# Altium PCB 多种信号发生器.pcbdoc
Units mil, origin at the board's own origin, x right, y up, seen from the top; angles counter-clockwise.
Board outline 4410 x 4980 mil, 2 copper layers (Top Layer, Bottom Layer); 78 components, 38 nets, 214 pads, 272 vias.
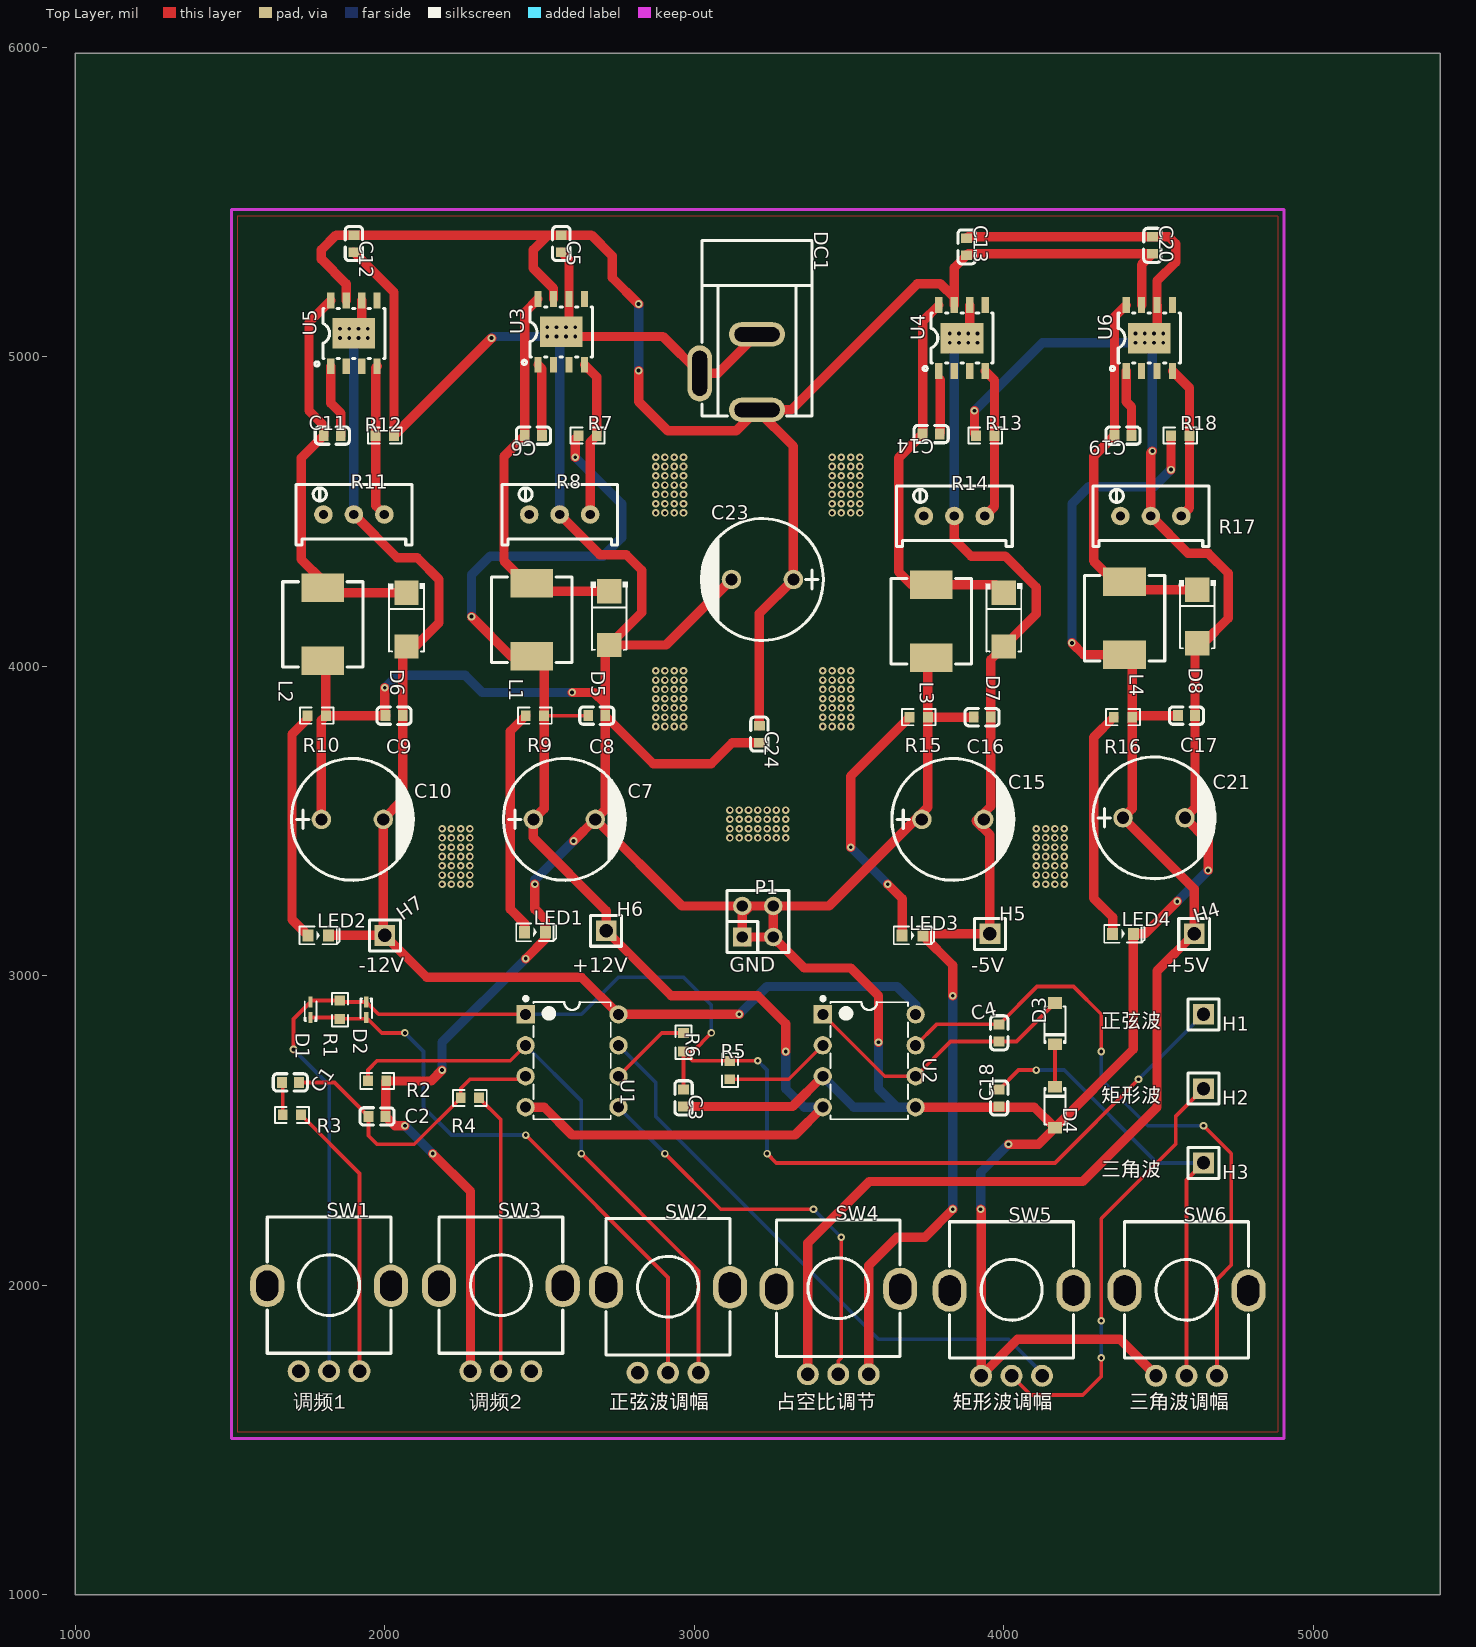
[diagram p0: Top Layer view]
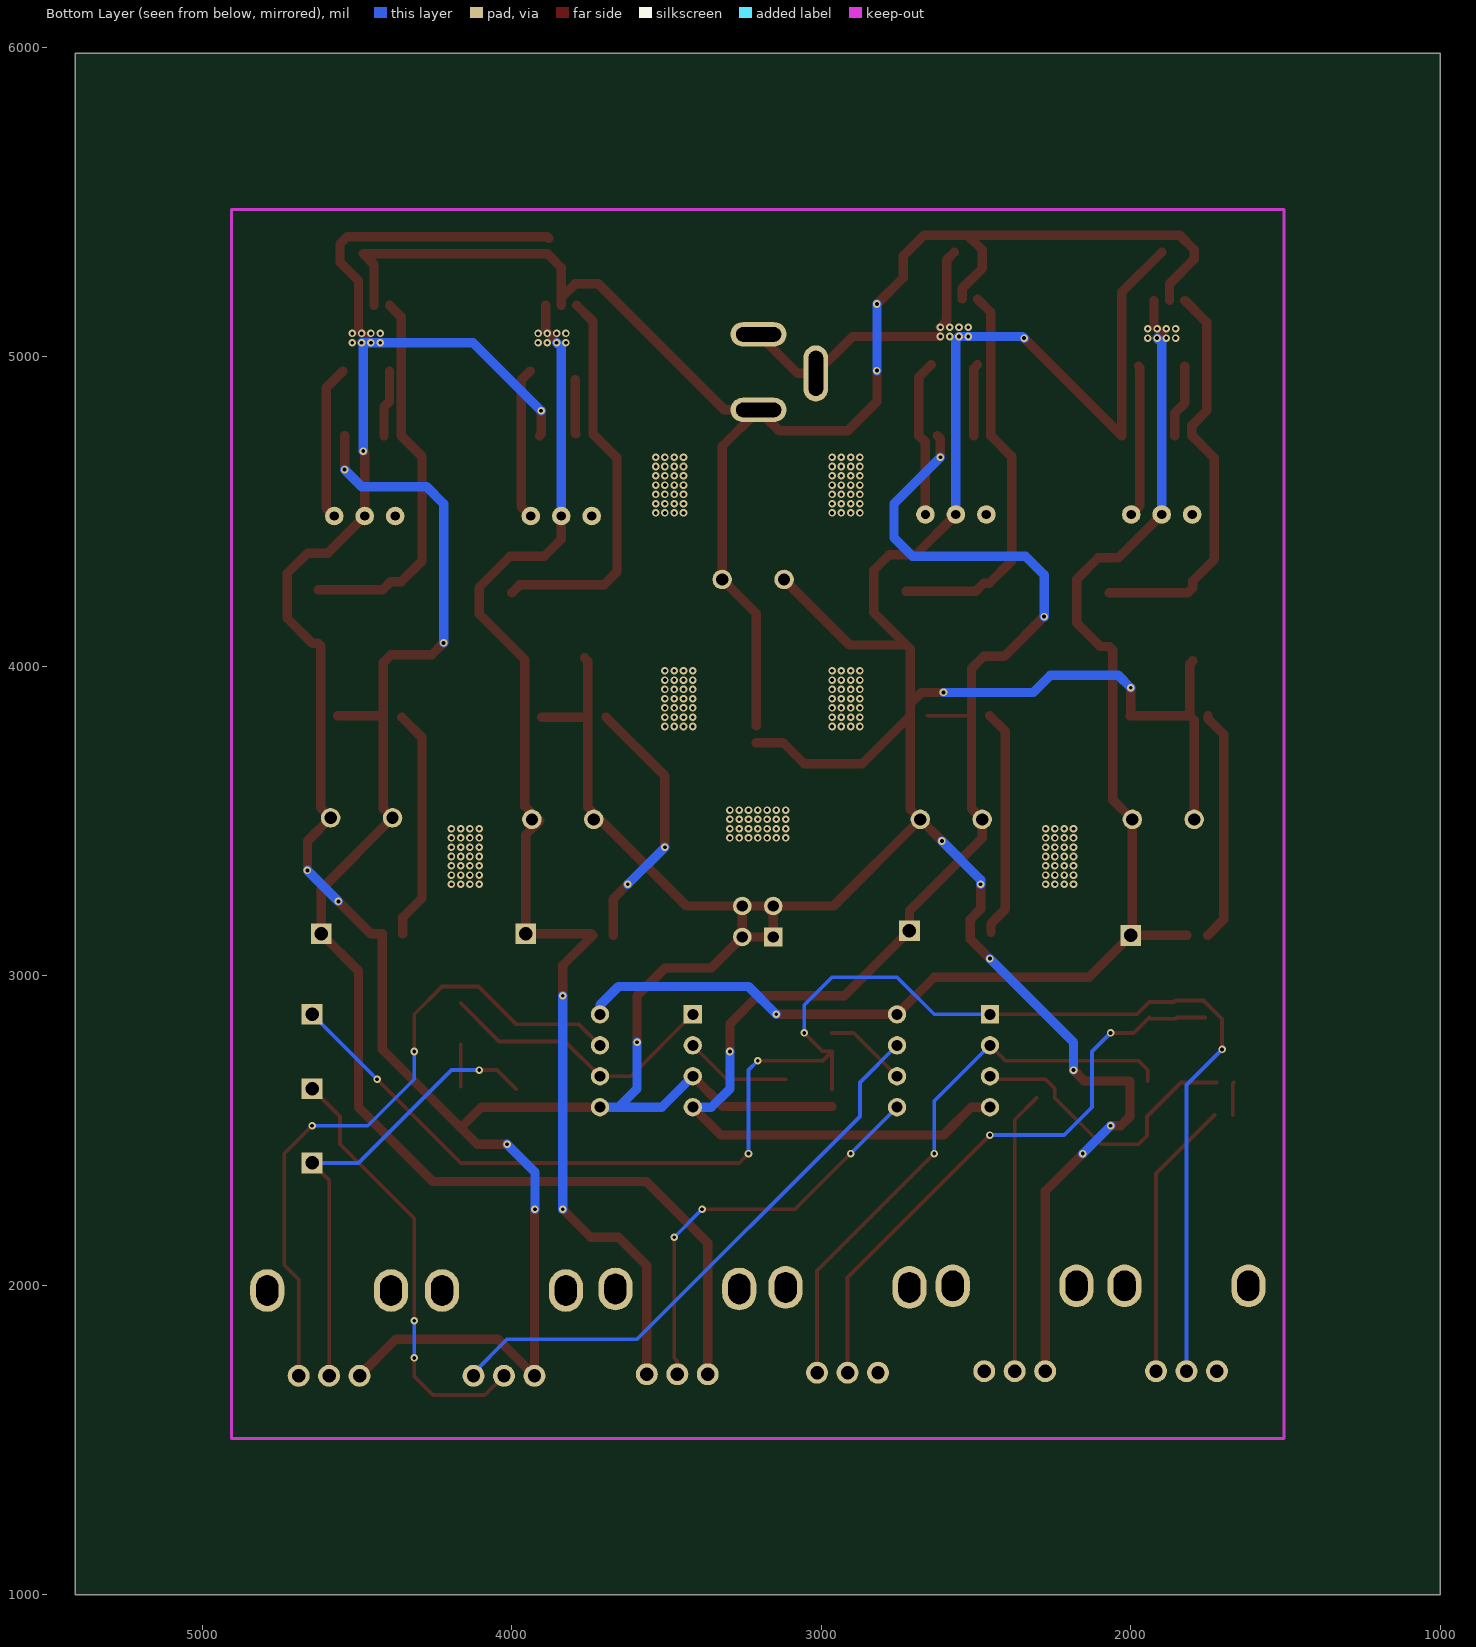
[diagram p1: Bottom Layer view, seen from below]

## Layer stack, top to bottom
Top Layer: signal copper (thickness not stored)
Dielectric: dielectric 12.6, FR-4, Dk 4.8
Bottom Layer: signal copper (thickness not stored)

## Board outline
5410,1000 1000,1000 1000,5980 5410,5980

## Components (designator, comment, footprint, x,y, rotation, side; value= is the part's Value field where it differs from the comment)
C1 "100nF" C0603 1695,2655 r0 top
C2 "100nF" C0603 1975,2545 r0 top
C3 "100nF" C0603 2965,2605 r270 top
C4 "10nF" C0603 3985,2815 r270 top
C5 "100nF" C0603 2570,5365 r270 top
C6 "10nF" C0603 2480,4745 r180 top
C7 "470uF" CAP-TH_BD10.0-P5.00-D1.0-FD 2580,3505 r0 top
C8 "100nF" C0603 2685,3840 r0 top
C9 "100nF" C0603 2030,3840 r0 top
C10 "470uF" CAP-TH_BD10.0-P5.00-D1.0-FD 1895,3505 r0 top
C11 "100nF" C0603 1830,4745 r180 top
C12 "100nF" C0603 1900,5365 r270 top
C13 "100nF" C0603 3880,5355 r90 top
C14 "100nF" C0603 3765,4750 r180 top
C15 "470uF" CAP-TH_BD10.0-P5.00-D1.0-FD 3835,3505 r0 top
C16 "100nF" C0603 3930,3835 r0 top
C17 "100nF" C0603 4590,3840 r0 top
C18 "10uF" C0603 3985,2605 r90 top
C19 "10nF" C0603 4385,4745 r180 top
C20 "100nF" C0603 4480,5360 r90 top
C21 "470uF" CAP-TH_BD10.0-P5.00-D1.0-FD 4485,3510 r0 top
C23 "470uF" CAP-TH_BD10.0-P5.00-D1.0-FD 3220,4280 r180 top
C24 "100nF" C0603 3210,3780 r270 top
D1 "1N4148WT_C727112" SOD-523_L1.2-W0.8-LS1.6-RD 1760,2890 r90 top
D2 "1N4148WT_C727112" SOD-523_L1.2-W0.8-LS1.6-RD 1940,2890 r270 top
D3 "DZL4734" SOD-123_L2.8-W1.8-LS3.7-RD 4165,2845 r90 top
D4 "DZL4734" SOD-123_L2.8-W1.8-LS3.7-RD 4165,2575 r270 top
D5 "SS34_C8678" SMA_L4.3-W2.6-LS5.2-RD 2725,4155 r270 top
D6 "SS34_C8678" SMA_L4.3-W2.6-LS5.2-RD 2070,4150 r270 top
D7 "SS34_C8678" SMA_L4.3-W2.6-LS5.2-RD 4000,4150 r270 top
D8 "SS34_C8678" SMA_L4.3-W2.6-LS5.2-RD 4625,4160 r270 top
DC1 "DC005_C431533" DC-IN-TH_DC005 3110,4950 r270 top
H1 "PZ254V-11-01P" HDR-TH_1P-P2.54-V-M 4645,2875 r0 top
H2 "PZ254V-11-01P" HDR-TH_1P-P2.54-V-M 4645,2635 r0 top
H3 "PZ254V-11-01P" HDR-TH_1P-P2.54-V-M 4645,2395 r0 top
H4 "PZ254V-11-01P" HDR-TH_1P-P2.54-V-M 4615,3135 r0 top
H5 "PZ254V-11-01P" HDR-TH_1P-P2.54-V-M 3955,3135 r270 top
H6 "PZ254V-11-01P" HDR-TH_1P-P2.54-V-M 2715,3145 r270 top
H7 "PZ254V-11-01P" HDR-TH_1P-P2.54-V-M 2000,3130 r270 top
L1 "10uH" IND-SMD_L7.3-W6.8 2475,4150 r270 top
L2 "10uH" IND-SMD_L7.3-W6.8 1800,4135 r270 top
L3 "10uH" IND-SMD_L7.3-W6.8 3765,4145 r270 top
L4 "10uH" IND-SMD_L7.3-W6.8 4390,4155 r270 top
LED1 "LED-0603_R" LED0603_RED 2485,3140 r0 top
LED2 "LED-0603_R" LED0603_RED 1785,3130 r0 top
LED3 "LED-0603_R" LED0603_RED 3705,3130 r0 top
LED4 "LED-0603_R" LED0603_RED 4385,3135 r0 top
P1 "Header-Male-2.54_2x2" HDR-TH_4P-P2.54-V-M-R2-C2-S2.54-1 3205,3175 r0 top
R1 "20kΩ" R0603 1855,2890 r90 top
R2 "10kΩ" R0603 1975,2660 r180 top
R3 "68Ω" R0603 1700,2550 r0 top
R4 "68Ω" R0603 2275,2605 r180 top
R5 "10kΩ" R0603 3115,2695 r90 top
R6 "10kΩ" R0603 2965,2785 r270 top
R7 "10kΩ" R0603 2655,4745 r0 top
R8 "10kΩ" RES-ADJ-TH_3P-L10.0-W10.0-P2.50-L 2565,4490 r0 top
R9 "1k" R0603 2485,3840 r0 top
R10 "1k" R0603 1780,3840 r0 top
R11 "10kΩ" RES-ADJ-TH_3P-L10.0-W10.0-P2.50-L 1900,4490 r0 top
R12 "10kΩ" R0603 2000,4745 r180 top
R13 "10kΩ" R0603 3940,4745 r0 top
R14 "10kΩ" RES-ADJ-TH_3P-L10.0-W10.0-P2.50-L 3840,4485 r0 top
R15 "1k" R0603 3725,3835 r0 top
R16 "1k" R0603 4385,3835 r0 top
R17 "10kΩ" RES-ADJ-TH_3P-L10.0-W10.0-P2.50-L 4475,4485 r0 top
R18 "10kΩ" R0603 4570,4745 r0 top
SW1 "100kΩ" RES-ADJ-TH_RK09D1130C4G 1820,1860 r0 top
SW2 "20kΩ" RES-ADJ-TH_RK09D1130C4G 2915,1855 r0 top
SW3 "100kΩ" RES-ADJ-TH_RK09D1130C4G 2375,1860 r0 top
SW4 "10kΩ" RES-ADJ-TH_RK09D1130C4G 3465.03,1849.99 r0 top
SW5 "10kΩ" RES-ADJ-TH_RK09D1130C4G 4025,1845 r0 top
SW6 "10kΩ" RES-ADJ-TH_RK09D1130C4G 4590,1845 r0 top
U1 "OPA2134PA" DIP-8_L9.6-W6.4-P2.54-LS7.6-BL-1 2605,2725 r270 top
U2 "OPA2134PA" DIP-8_L9.6-W6.4-P2.54-LS7.6-BL-1 3565,2725 r270 top
U3 "TPS5430DDAR" ESOP-8_L4.9-W3.9-P1.27-LS6.0-TL-EP 2570,5080 r90 top
U4 "TPS5430DDAR" ESOP-8_L4.9-W3.9-P1.27-LS6.0-TL-EP 3865,5060 r90 top
U5 "TPS5430DDAR" ESOP-8_L4.9-W3.9-P1.27-LS6.0-TL-EP 1900,5075 r90 top
U6 "TPS5430DDAR" ESOP-8_L4.9-W3.9-P1.27-LS6.0-TL-EP 4470,5060 r90 top

## Footprints (in the part's own frame and the unit in brackets; to place one, negate y for a bottom-side part, rotate by r counter-clockwise, add the part's x,y. Pads: shape width x height; smd on the part's side, far side on the other; paste and mask are expansions set on the pad)
C0603 [mm]
  rect 0.8x0.9 smd paste+0 mask+0.051: 1(-0.7,0) 2(0.7,0)
  silkscreen extent -1.41,-0.71 1.39,0.72
CAP-TH_BD10.0-P5.00-D1.0-FD [mm]
  round 1.6 hole 1 paste+0 mask+0.051: 1(-2.54,0) 2(2.54,0)
  silkscreen extent -5,-5 5.08,5
DC-IN-TH_DC005 [mm]
  oval 2x4.6 hole 1.2 slot 3.7 at 90 deg paste+0 mask+0.051: 1(3.1,2.35) 2(-3.1,2.35)
  oval 4.6x2 hole 1.2 slot 3.7 at 0 deg paste+0 mask+0.051: 3(0.1,-2.35)
  silkscreen extent -10.8,-2.15 3.6,6.85
DIP-8_L9.6-W6.4-P2.54-LS7.6-BL-1 [mm]
  rect 1.5x1.5 hole 0.9 paste+0 mask+0.051: 1(-3.81,-3.81)
  round 1.5 hole 0.9 paste+0 mask+0.051: 2(-1.27,-3.81) 3(1.27,-3.81) 4(3.81,-3.81) 5(3.81,3.81) 6(1.27,3.81) 7(-1.27,3.81) 8(-3.81,3.81)
  silkscreen extent -5.25,-3.95 4.8,3.18
ESOP-8_L4.9-W3.9-P1.27-LS6.0-TL-EP [mm]
  rect 1.3x0.6 smd paste+0 mask+0.051: 1(-2.7,1.905) 2(-2.7,0.635) 3(-2.7,-0.635) 4(-2.7,-1.905) 5(2.7,-1.905) 6(2.7,-0.635) 7(2.7,0.635) 8(2.7,1.905)
  rect 2.5x3.5 smd paste+0 mask+0.051: 9(0,0)
  silkscreen extent -2.67,-2.55 2.05,3.2
HDR-TH_1P-P2.54-V-M [mm]
  rect 1.7x1.7 hole 1.1 paste+0 mask+0.051: 1(0,0)
  silkscreen extent -1.27,-1.27 1.27,1.27
HDR-TH_4P-P2.54-V-M-R2-C2-S2.54-1 [mil]
  rect 60x60 hole 36 paste+0 mask+2: 1(-50,-50)
  round 60 hole 36 paste+0 mask+2: 2(-50,50) 3(50,-50) 4(50,50)
  silkscreen extent -100,-100 100,100
IND-SMD_L7.3-W6.8 [mm]
  rect 2.35x3.5 smd paste+0 mask+0.051: 1(-3,0) 2(3,0)
  silkscreen extent -3.5,-3.3 3.5,3.3
LED0603_RED [mm]
  rect 0.9x1 smd paste+0 mask+0.051: 1(-0.85,0) 2(0.85,0)
  silkscreen extent -1.54,-0.73 1.75,0.73
R0603 [mil]
  rect 31.75x34.02 smd paste-3937.01 mask+2: 1(-29.66,0) 2(29.66,0)
  silkscreen extent -55,-26 55,26
RES-ADJ-TH_3P-L10.0-W10.0-P2.50-L [mil]
  round 60 hole 30 paste+0 mask+2: 1(-98.43,0) 2(0,0) 3(98.43,0)
  silkscreen extent -187,-98 187,96
RES-ADJ-TH_RK09D1130C4G [mm]
  round 1.8 hole 1.1 paste+0 mask+0.05: 1(-2.5,-3.5) 2(0,-3.5) 3(2.5,-3.5)
  oval 2.8x3.5 hole 1.8 slot 2.5 at 90 deg paste+0 mask+0.05: 4(-5.08,3.5) 5(5.08,3.5)
  silkscreen extent -5.08,-2.03 5.08,9.14
SMA_L4.3-W2.6-LS5.2-RD [mm]
  rect 2x2 smd paste+0 mask+0.051: 1(-2.2,0) 2(2.2,0)
  silkscreen extent -2.98,-1.5 2.6,1.5
SOD-123_L2.8-W1.8-LS3.7-RD [mm]
  rect 0.95x1.15 smd paste+0 mask+0.051: 1(-1.693,0) 2(1.693,0)
  silkscreen extent -1.58,-0.87 1.41,0.87
SOD-523_L1.2-W0.8-LS1.6-RD [mm]
  rect 0.93x0.36 smd paste+0 mask+0.051: 1(-0.635,0) 2(0.635,0)
  silkscreen extent -0.91,-0.55 0.68,0.55

## Via types
v1: diameter 24.41, hole 12.2, Top Layer to Bottom Layer, tented both sides, 272 vias

## Nets (pads, with @x,y where several pads share a name; then routed paths per layer and width w, separated by ;. In a path a pad name is that pad's centre, name@x,y a point inside that pad or via, vN(x,y) a via of type N, cw(c..) or ccw(c..) an arc to the next point about the centre after c; other vN are vias at no path point)
+5V: C17.1 C21.1 H4.1 L4.2 R16.2 R18.1 SW4.1 | length 4625.1
  Top Layer w30: SW4.1 3366.57,2136.57 3565,2335 4255,2335 4495,2575 4495,3015 H4.1
  Top Layer w30.31: v1(4220,4075) 4258.11,4036.89 L4.2 4414.66,4012.23 R16.2 ; v1(4540,4635) 4540,4744.66 R18.1 ; C17.1 4419.66,3840 R16.2 ; H4.1 4615,3280 C21.1 4414.66,3539.66 R16.2
  Bottom Layer w30.31: v1(4220,4075) 4220,4525 4275,4580 4485,4580 v1(4540,4635)
+12V: C7.1 C8.1 H6.1 L1.2 R7.1 R9.2 U1.4 U2.4 | length 4565.7
  Top Layer w12: R9.2 C8.1
  Top Layer w30: U1.4 2515,2575 2605,2485 3325,2485 U2.4 ; H6.1 2925,2935 3205,2935 3295,2845 v1(3295,2755)
  Top Layer w30.31: v1(2280,4160) 2408.11,4031.89 L1.2 2514.66,3992.23 R9.2 2514.66,3539.66 C7.1 2480,3445 2715,3210 H6.1 ; v1(2615,4675) 2615,4734.65 R7.1
  Bottom Layer w30: v1(3295,2755) 3295,2635 3355,2575 U2.4
  Bottom Layer w30.31: v1(2280,4160) 2280,4295 2340,4355 2705,4355 2765,4415 2765,4525 v1(2615,4675)
-5V: C15.2 C16.2 D7.2 H5.1 LED3.2 R14.2 SW4.3 U4.6 U4.9 | length 4148.1
  Top Layer w30: SW4.3 3563.42,2063.42 3655,2155 3745,2155 v1(3835,2245) ; v1(3835,2935) 3835,3033.46 LED3.2 3743.46,3135 H5.1
  Top Layer w30.31: R14.2 3840,4410 3895,4355 4005,4355 4105,4255 4105,4168.39 D7.2 3957.56,4020.95 C16.2 3957.56,3547.56 3910,3500 3955,3455 H5.1 ; U4.9 3890,5085 U4.6
  Bottom Layer w30: v1(3835,2245) v1(3835,2935)
  Bottom Layer w30.31: R14.2 3840,5030 v1(3855,5045)
  other v1: 3825,5045 3885,5045 3915,5045 3825,5075 3855,5075 3885,5075 3915,5075
-12V: C9.2 C10.2 D6.2 H7.1 LED2.2 R11.2 U1.8 U2.8 U5.6 U5.9 | length 4392.4
  Top Layer w30: H7.1 2135,2995 2635,2995 U1.8 v1(3145,2875)
  Top Layer w30.31: LED2.2 H7.1 1995,3135 C10.2 2057.56,3567.56 C9.2 2057.56,4050.94 D6.2 2098.38,4063.38 2175,4140 2175,4280 2105,4350 2040,4350 R11.2 ; U5.9 1925,5100.01 U5.6
  Bottom Layer w30: v1(3145,2875) 3235,2965 3655,2965 3715,2905 U2.8
  Bottom Layer w30.31: R11.2 1900,5045 v1(1915,5060)
  other v1: 1855,5060 1885,5060 1945,5060 1855,5090 1885,5090 1915,5090 1945,5090
C1_1: C1.1 R3.1 | length 106.2
  Top Layer w12: C1.1 1670.34,2652.1 R3.1
C1_2: C1.2 C2.1 R4.2 U1.3 | length 960.8
  Top Layer w12: C1.2 1837.44,2655 C2.1 1947.44,2482.56 1975,2455 2095.34,2455 R4.2 2245.34,2635.34 2275,2665 2445,2665 U1.3
C11_1: C11.1 U5.1 | length 237.2
  Top Layer w30.31: U5.1 1825,4850 1857.55,4817.45 C11.1
C19_1: C19.1 U6.1 | length 216
  Top Layer w30.31: U6.1 4395,4855 4412.56,4837.44 C19.1
D1_1: D1.1 D2.2 R1.1 SW2.2 | length 1920
  Top Layer w12: D1.1 1850.34,2865 R1.1 1935.34,2860.34 D2.2 1990,2815 v1(2065,2815) ; v1(2455,2485) 2915,2025 SW2.2
  Bottom Layer w12: v1(2065,2815) 2125,2755 2125,2575 2215,2485 v1(2455,2485)
D3_1: D3.1 D4.1 | length 136.7
  Top Layer w12: D4.1 D3.1
D6_1: C11.2 D6.1 L2.1 U5.8 | length 1312.7
  Top Layer w30.31: U5.8 1755,5111.29 1755,4825 1802.44,4777.56 C11.2 1730,4672.56 1730,4345 1800,4275 L2.1 1816.49,4236.61 D6.1
D8_1: C19.2 D8.1 L4.1 U6.8 | length 1243.5
  Top Layer w30.31: U6.8 4357.44,5128.74 C19.2 4290,4677.56 4290,4340 4356.89,4273.11 L4.1 4416.5,4246.61 D8.1
GND: C2.2 C3.2 C5.2 C7.2 C8.2 C9.1 C10.1 C12.2 C13.2 C15.1 C16.1 C17.2 C18.1 C20.2 C21.2 C23.2 C24.2 D4.2 D5.2 D8.2 DC1.2 DC1.3 L2.2 L3.2 LED1.2 LED4.2 P1.1 P1.2 P1.3 P1.4 R2.1 R8.2 R10.2 R12.1 R13.1 R15.2 R17.2 SW3.1 SW5.1 SW6.1 U2.3 U2.5 U3.6 U3.9 U6.6 U6.9 | length 19804.9
  Top Layer w30: v1(2065,2515) 2032.56,2515 C2.2 2002.56,2657.9 R2.1 2150,2660 v1(2185,2695) ; v1(2155,2425) 2276.57,2303.43 SW3.1 ; v1(2455,3055) 2518.46,3118.46 LED1.2 ; C8.2 2867.56,3685 3055,3685 3122.44,3752.44 C24.2 ; C3.2 3317.44,2577.44 U2.3 ; P1.3 3355,3025 3505,3025 3595,2935 v1(3595,2785) ; U2.5 4098.37,2575 D4.2 ; v1(3925,2245) 3926.57,2243.43 SW5.1 4044.37,1825 4375,1825 4491.57,1708.43 SW6.1 ; v1(4015,2455) 4111.63,2455 D4.2 ; LED4.2 4418.46,2761.83 D4.2 ; C20.2 4532.44,5387.56 4555,5365 4555,5305 4495,5245 U6.6
  Top Layer w30.31: C10.1 1795,3825.34 R10.2 ; L2.2 1809.66,4007.23 R10.2 ; C12.2 2029.65,5207.79 R12.1 2344.65,5060 v1@2345,5060 ; v1(2000,3930) 2000,3842.45 C9.1 R10.2 ; v1(2485,3295) 2485,3215 2518.5,3181.5 LED1.2 ; R8.2 2695,4360 2780,4360 2830,4310 2830,4173.4 D5.2 ; C5.2 2595,5312.44 U3.6 2595,5115 v1(2615,5095) ; v1(2605,3915) 2676.01,3915 2712.56,3878.46 ; v1(2610,3435) C7.2 ; v1(2615,5065) 2898.53,5065 DC1.3 3076.54,4946.06 DC1.2 ; C8.2 2712.56,4055.94 D5.2 ; C8.2 2712.6,3537.6 C7.2 ; C23.2 2908.38,4068.38 D5.2 ; P1.2@3165,3210 3180,3225 P1.4 ; P1.3 3180,3125 3165,3110 3155,3120 P1.2 2960,3225 C7.2 ; P1.3@3265,3110 3255,3120 P1.4 ; L3.2 3754.66,4016.55 R15.2 ; C13.2 3885,5387.56 C20.2 ; C16.1 R15.2 ; v1(3905,4825) 3905,4750.34 R13.1 ; LED4.2 4455,3135 v1(4560,3240) ; U6.9 4495,5085 U6.6 ; v1(4480,4695) 4475,4690 R17.2 4595,4365 4660,4365 4725,4300 4725,4155 4643.39,4073.39 D8.2 4617.56,4065.95 C17.2 4617.56,3542.56 C21.2 4660,3435 v1(4660,3340) ; P1.4 3435,3225 3710,3500 3754.66,3544.66 R15.2
  Bottom Layer w30: v1(2065,2515) v1(2155,2425) ; v1(2185,2695) 2185,2785 v1(2455,3055) ; U2.3 3515,2575 3655,2575 ; v1(3595,2785) 3595,2635 3655,2575 ; U2.5 3655,2575 ; v1(3925,2245) 3925,2365 v1(4015,2455)
  Bottom Layer w30.31: v1(2000,3930) 2040,3970 2260,3970 2315,3915 v1(2605,3915) ; v1@2344.65,5060 2349.65,5065 v1(2555,5065) 2565,5055 R8.2 ; v1(2485,3295) 2485,3310 v1(2610,3435) ; v1(3905,4825) 4125,5045 v1(4485,5045) 4480,5040 v1(4480,4695) ; v1(4560,3240) v1(4660,3340)
  other v1: 2185,3295 2215,3295 2245,3295 2275,3295 4105,3295 4135,3295 4165,3295 4195,3295 2185,3325 2215,3325 2245,3325 2275,3325 4105,3325 4135,3325 4165,3325 4195,3325 2185,3355 2215,3355 2245,3355 2275,3355 4105,3355 4135,3355 4165,3355 4195,3355 2185,3385 2215,3385 2245,3385 2275,3385 4105,3385 4135,3385 4165,3385 4195,3385 2185,3415 2215,3415 2245,3415 2275,3415 4105,3415 4135,3415 4165,3415 4195,3415 2185,3445 2215,3445 2245,3445 2275,3445 3115,3445 3145,3445 3175,3445 3205,3445 3235,3445 3265,3445 3295,3445 4105,3445 4135,3445 4165,3445 4195,3445 2185,3475 2215,3475 2245,3475 2275,3475 3115,3475 3145,3475 3175,3475 3205,3475 3235,3475 3265,3475 3295,3475 4105,3475 4135,3475 4165,3475 4195,3475 3115,3505 3145,3505 3175,3505 3205,3505 3235,3505 3265,3505 3295,3505 3115,3535 3145,3535 3175,3535 3205,3535 3235,3535 3265,3535 3295,3535 2875,3805 2905,3805 2935,3805 2965,3805 3415,3805 3445,3805 3475,3805 3505,3805 2875,3835 2905,3835 2935,3835 2965,3835 3415,3835 3445,3835 3475,3835 3505,3835 2875,3865 2905,3865 2935,3865 2965,3865 3415,3865 3445,3865 3475,3865 3505,3865 2875,3895 2905,3895 2935,3895 2965,3895 3415,3895 3445,3895 3475,3895 3505,3895 2875,3925 2905,3925 2935,3925 2965,3925 3415,3925 3445,3925 3475,3925 3505,3925 2875,3955 2905,3955 2935,3955 2965,3955 3415,3955 3445,3955 3475,3955 3505,3955 2875,3985 2905,3985 2935,3985 2965,3985 3415,3985 3445,3985 3475,3985 3505,3985 2875,4495 2905,4495 2935,4495 2965,4495 3445,4495 3475,4495 3505,4495 3535,4495 2875,4525 2905,4525 2935,4525 2965,4525 3445,4525 3475,4525 3505,4525 3535,4525 2875,4555 2905,4555 2935,4555 2965,4555 3445,4555 3475,4555 3505,4555 3535,4555 2875,4585 2905,4585 2935,4585 2965,4585 3445,4585 3475,4585 3505,4585 3535,4585 2875,4615 2905,4615 2935,4615 2965,4615 3445,4615 3475,4615 3505,4615 3535,4615 2875,4645 2905,4645 2935,4645 2965,4645 3445,4645 3475,4645 3505,4645 3535,4645 2875,4675 2905,4675 2935,4675 2965,4675 3445,4675 3475,4675 3505,4675 3535,4675 4425,5045 4455,5045 4515,5045 2344.65,5060 2525,5065 2585,5065 4425,5075 4455,5075 4485,5075 4515,5075 2525,5095 2555,5095 2585,5095
LED1_1: LED1.1 R9.1 | length 740.1
  Top Layer w30.31: LED1.1 2451.53,3168.47 2405,3215 2405,3789.65 R9.1
LED3_1: LED3.1 R15.1 | length 852.8
  Top Layer w30.31: v1(3505,3415) 3505,3644.66 R15.1 ; v1(3625,3295) 3671.53,3248.47 LED3.1
  Bottom Layer w30.31: v1(3505,3415) v1(3625,3295)
R3_2: R3.2 SW1.3 | length 906
  Top Layer w12: R3.2 1918.42,2361.24 SW1.3
R4_1: R4.1 SW3.2 | length 911.9
  Top Layer w12: R4.1 2375,2534.66 SW3.2
R10_1: LED2.1 R10.1 | length 752.2
  Top Layer w30.31: R10.1 1750.35,3830.35 1700,3780 1700,3181.53 LED2.1
R11_3: R11.3 R12.2 U5.4 | length 492.3
  Top Layer w30.31: U5.4 1970.34,4964.04 R12.2 1970.34,4518.08 R11.3
R16_1: LED4.1 R16.1 | length 752.6
  Top Layer w30.31: LED4.1 4351.53,3188.47 4290,3250 4290,3769.66 R16.1
R17_3: R17.3 R18.2 U6.4 | length 502.2
  Top Layer w30.31: U6.4 4599.66,4899.05 R18.2 4599.66,4511.24 R17.3
SW2_3: R2.2 SW2.3 U1.2 | length 1867.1
  Top Layer w12: R2.2 1945.34,2695.34 1975,2725 2405,2725 U1.2 ; v1(2635,2425) 3013.42,2046.58 SW2.3
  Bottom Layer w12: U1.2 2635,2595 v1(2635,2425)
U1_5: SW4.2 U1.5 | length 1340.9
  Top Layer w12: v1(2905,2425) 3085,2245 v1(3385,2245) ; SW4.2 3465,1755 3475,1765 v1(3475,2155)
  Bottom Layer w12: U1.5 v1(2905,2425) ; v1(3385,2245) v1(3475,2155)
U1_6: R6.1 U1.6 | length 267.9
  Top Layer w12: U1.6 2894.66,2814.66 R6.1
U1_7: SW5.3 U1.7 | length 1880.6
  Bottom Layer w12: U1.7 2875,2655 2875,2545 3595,1825 4015,1825 4123.42,1716.58 SW5.3
U2_2: R5.1 U2.2 | length 345.4
  Top Layer w12: R5.1 3305.34,2665.34 U2.2
U2_7: C4.1 SW6.3 U2.7 | length 2182.5
  Top Layer w12: U2.7 3782.56,2842.56 C4.1 4107.44,2965 4225,2965 4315,2875 v1(4315,2755) ; v1(4645,2515) 4735,2425 4735,2065 4688.42,2018.42 SW6.3
  Bottom Layer w12: v1(4315,2755) 4315,2665 4465,2515 v1(4645,2515)
U3_1: C6.1 U3.1 | length 233.9
  Top Layer w30.31: U3.1 2507.55,4961.15 C6.1
U3_4: R7.2 R8.3 U3.4 | length 508.9
  Top Layer w30.31: U3.4 2684.66,4934.05 R7.2 2663.42,4723.76 R8.3
U3_8: C6.2 D5.1 L1.1 U3.8 | length 1272.6
  Top Layer w30.31: U3.8 2452.45,5143.74 C6.2 2385,4677.56 2385,4340 2456.89,4268.11 L1.1 2501.49,4241.61 D5.1
U4_1: C14.1 U4.1 | length 176
  Top Layer w30.31: C14.1 3795,4752.44 3795,4925
U4_4: R13.2 R14.3 U4.4 | length 493.9
  Top Layer w30.31: R14.3 3969.66,4516.24 R13.2 3969.66,4924.05 U4.4
U4_8: C14.2 D7.1 L3.1 U4.8 | length 1283.5
  Top Layer w30.31: U4.8 3737.44,5113.74 C14.2 3660,4672.56 3660,4305 3701.89,4263.11 L3.1 3973.5,4263.11 D7.1
VIN: C5.1 C12.1 C13.1 C20.1 C23.1 C24.1 DC1.1 U3.7 U4.7 U5.7 U6.7 | length 5358.6
  Top Layer w30.31: U5.7 1875,5235 1795,5315 1795,5345 1842.55,5392.55 C12.1 C5.1 ; U3.7 2545,5220 2480,5285 2480,5345 2527.55,5392.55 C5.1 ; v1(2820,4955) 2820,4855 2915,4760 3134.55,4760 DC1.1 ; v1(2820,5170) 2735,5255 2735,5325 2667.45,5392.55 C5.1 ; C24.1 3210,4170 C23.1 3320,4710.47 DC1.1 ; U6.7 4445,5297.44 C20.1 3885,5332.44 C13.1 3840,5287.44 U4.7 3840,5190 3795,5235 3720,5235 3312.96,4827.96 DC1.1
  Bottom Layer w30.31: v1(2820,4955) v1(2820,5170)
VOUT1: C3.1 D1.2 D2.1 H1.1 R1.2 R5.2 R6.2 SW1.2 U1.1 | length 5186.4
  Top Layer w12: v1@1705,2755 1705,2860 D1.2 1764.66,2919.66 R1.2 1859.66,2915 D2.1 1980,2875 U1.1 ; C3.1 R6.2 ; v1(3055,2815) 2995.34,2755.34 R6.2 ; v1(3205,2725) 3115.34,2725 R5.2 2995.68,2724.66 R6.2 ; v1(3235,2425) 3265,2395 4165,2395 v1(4435,2665)
  Bottom Layer w12: v1(1705,2761.78) 1820,2646.78 SW1.2 ; U1.1 2635,2875 2755,2995 2965,2995 3055,2905 v1(3055,2815) ; v1(3205,2725) 3235,2695 v1(3235,2425) ; v1(4435,2665) H1.1
VOUT2: H2.1 SW5.2 | length 1407.3
  Top Layer w12: SW5.2 4087.2,1645 4255,1645 4315,1705 v1(4315,1765) ; v1(4315,1885) 4315,2215 4555,2455 4555,2545 H2.1
  Bottom Layer w12: v1(4315,1765) v1(4315,1885)
VOUT3: C4.2 D3.2 U2.1 U2.6 | length 930.9
  Top Layer w12: U2.1 3615,2675 U2.6 3827.44,2787.44 C4.2 4040.81,2787.44 D3.2
VOUT4: C18.2 H3.1 SW6.2 | length 1520.7
  Top Layer w12: C18.2 4047.44,2695 v1(4105,2695) ; SW6.2 4590,2340 H3.1
  Bottom Layer w12: v1(4105,2695) 4195,2695 4495,2395 H3.1
pads on no net: R8.1 R11.1 R14.1 R17.1 SW1.1 SW1.4 SW1.5 SW2.1 SW2.4 SW2.5 SW3.3 SW3.4 SW3.5 SW4.4 SW4.5 SW5.4 SW5.5 SW6.4 SW6.5 U3.2 U3.3 U3.5 U4.2 U4.3 U4.5 U5.2 U5.3 U5.5 U6.2 U6.3 U6.5

## Polygon pours and split planes (outlines as drawn)
GND on Top Layer (solid): 1525,5455 4885,5455 4885,1525 1525,1525

## Silkscreen, mask and mechanical layers (free items; w line width, h text height)
Top Overlay:
  text "-12V" at 1915,2995 h80
  text "+12V" at 2605,2995 h80
  text "GND" at 3115,2995 h80 r1
  text "-5V" at 3895,2995 h80
  text "+5V" at 4525,2995 h80
  text "正弦波" at 4315,2815 h80
  text "矩形波" at 4315,2575 h80
  text "三角波" at 4315,2335 h80
  text "调频1" at 1705,1585 h80
  text "调频2" at 2275,1585 h80
  text "正弦波调幅" at 2725,1585 h80
  text "占空比调节" at 3265,1585 h80
  text "矩形波调幅" at 3835,1585 h80
  text "三角波调幅" at 4405,1585 h80